# Altium PCB uz_per_voltage_card_breakout.PcbDoc
Units mm, origin at the board's own origin, x right, y up, seen from the top; angles counter-clockwise.
Board outline 80 x 118 mm, 2 copper layers (Top Layer, Bottom Layer); 33 components, 67 nets, 384 pads, 0 vias.
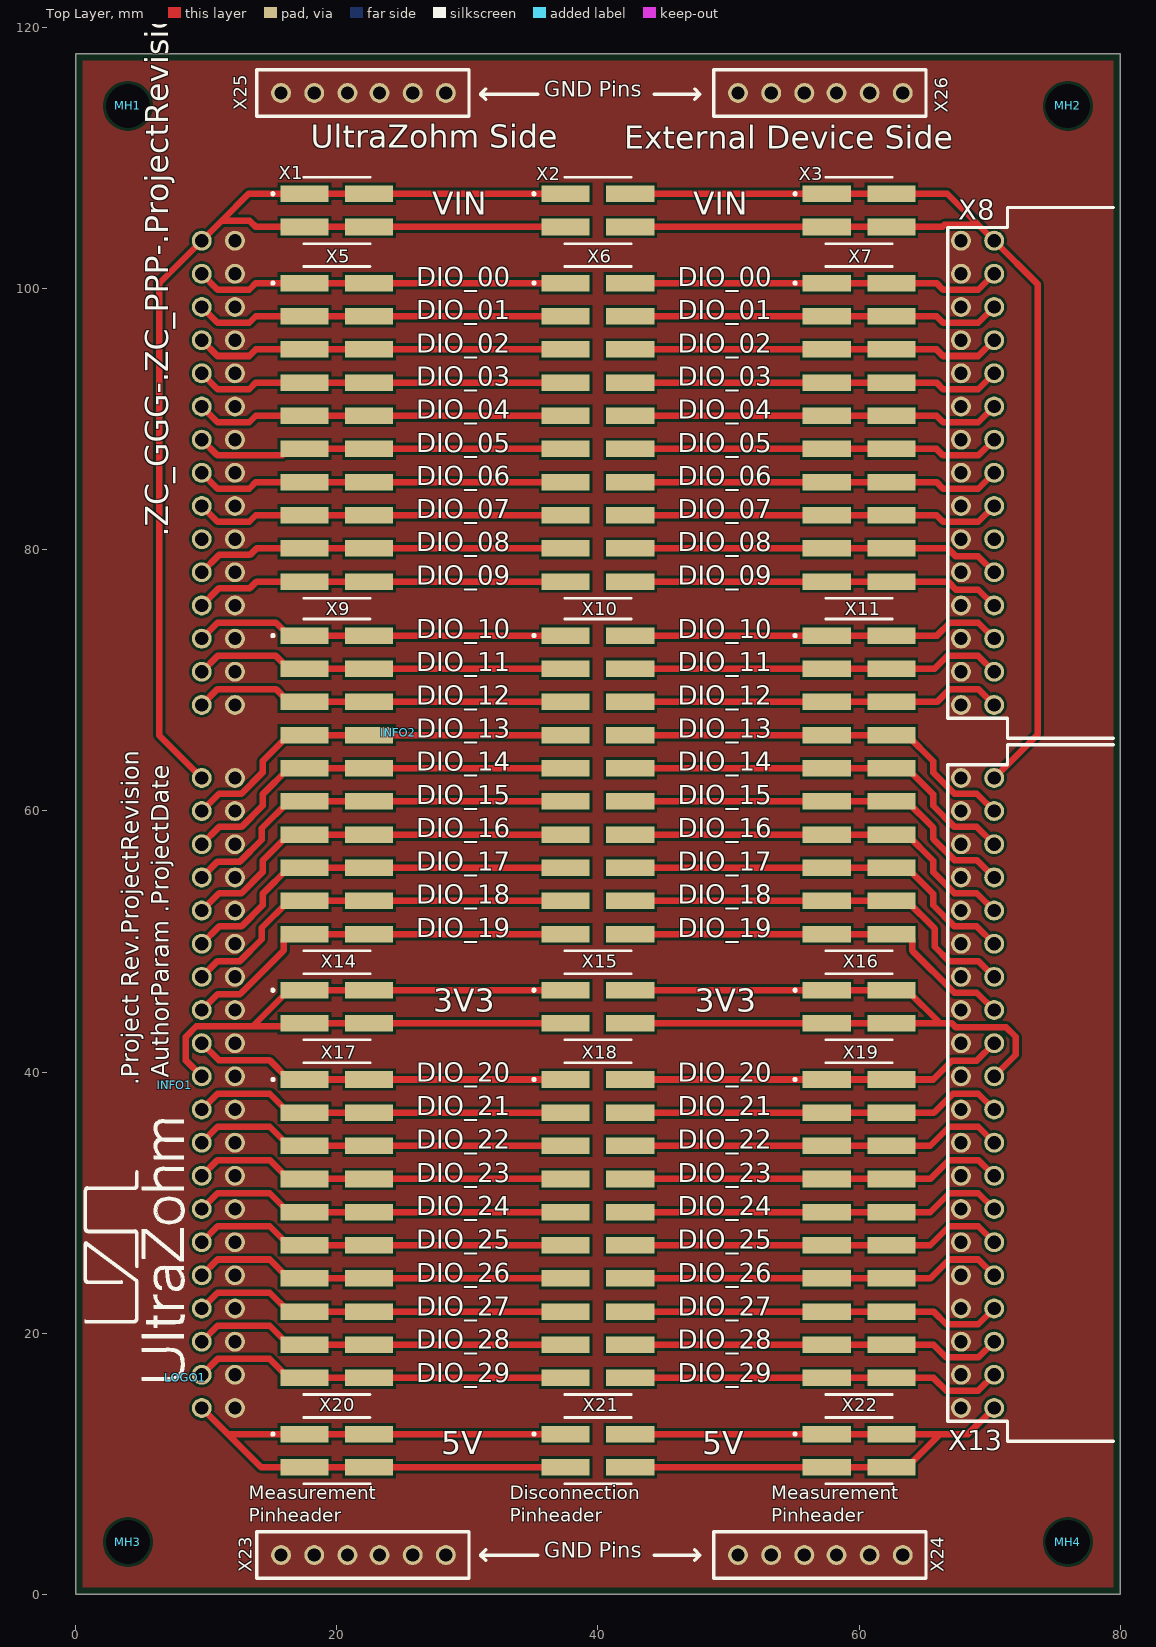
[diagram p0: Top Layer view]
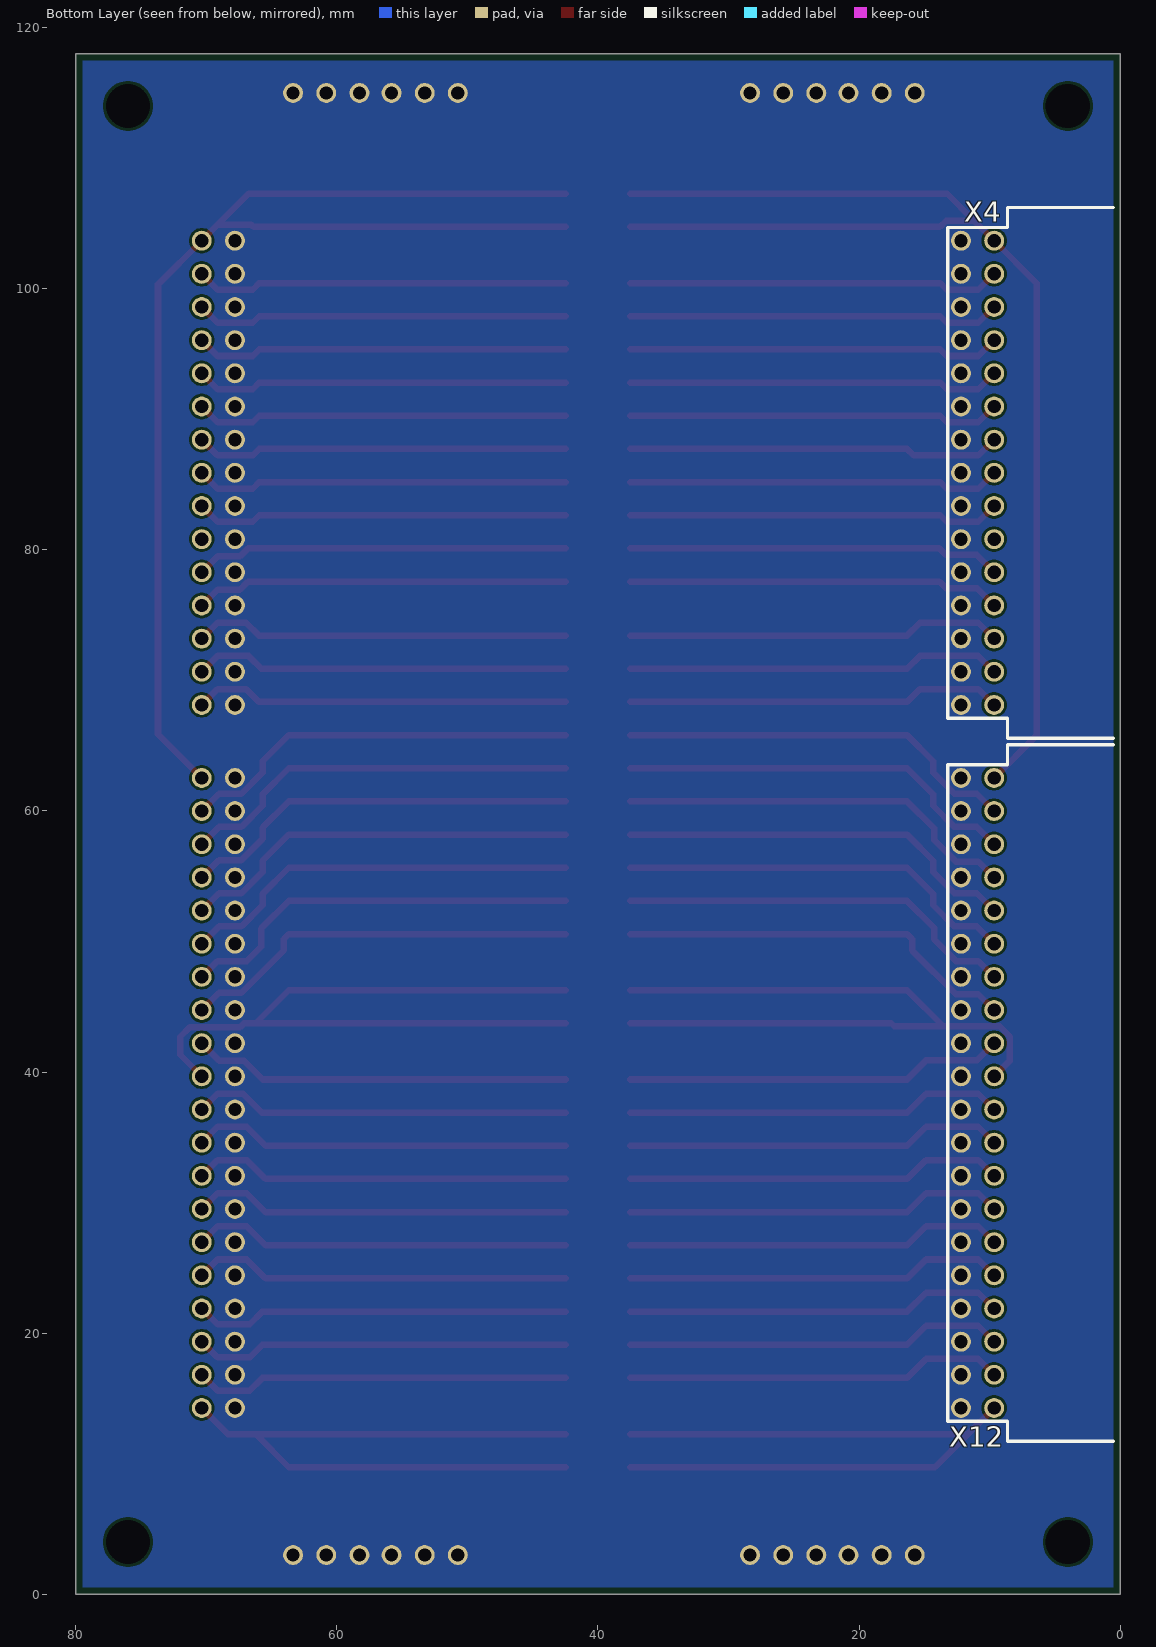
[diagram p1: Bottom Layer view, seen from below]
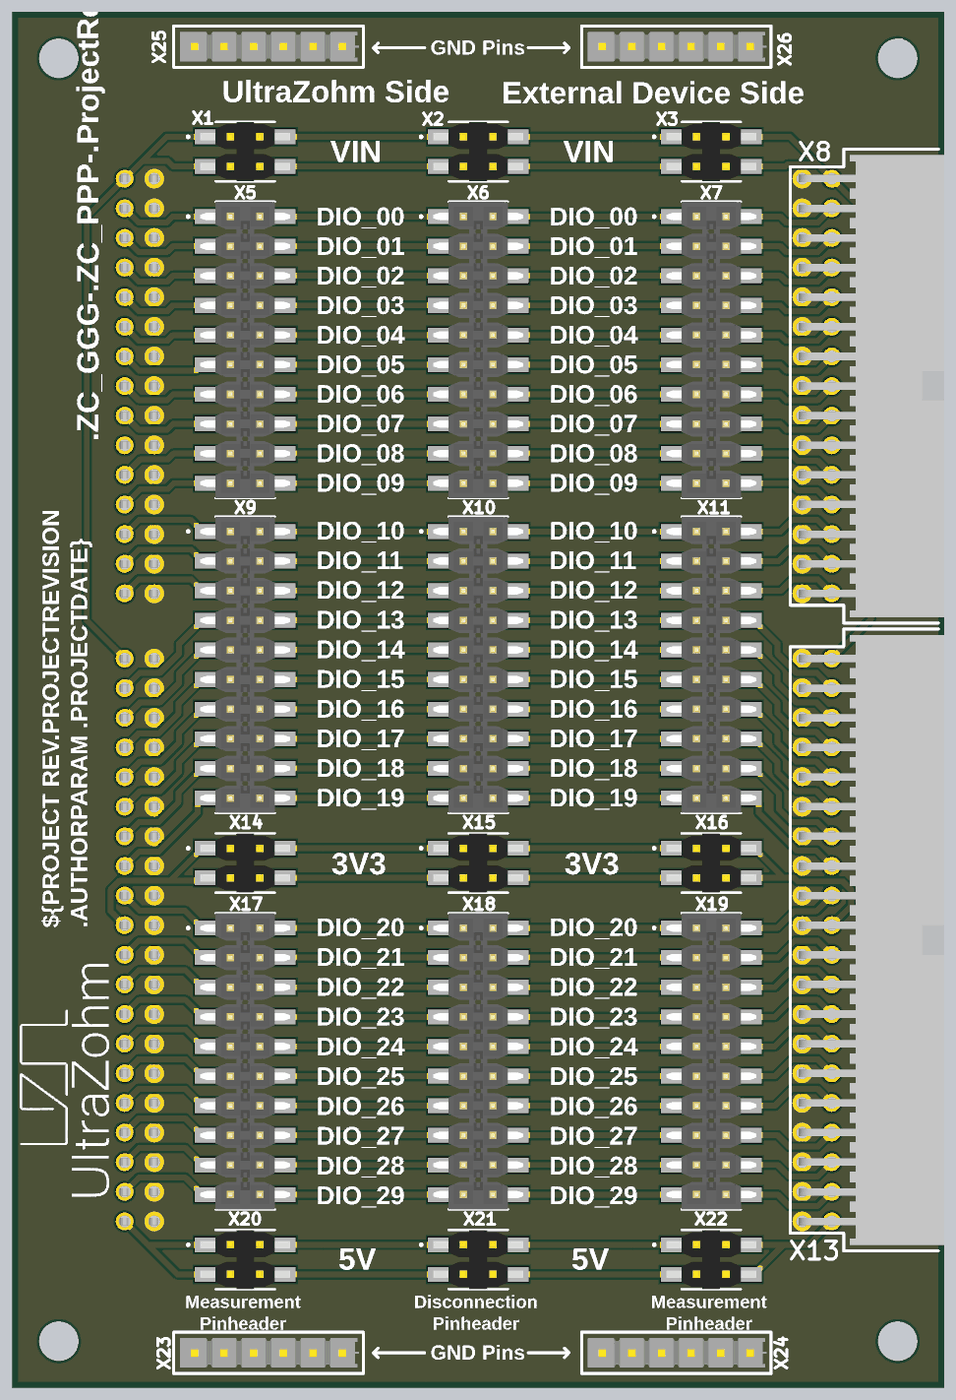
[diagram p2: 3D render of the assembled board from above, using the file's embedded part models]

## Layer stack, top to bottom
Top Solder: solder mask 0.0102, Solder Resist, Dk 3.5
Top Layer: signal copper 0.0356
Dielectric 1: dielectric 0.32, FR-4, Dk 4.8
Bottom Layer: signal copper 0.0356
Bottom Solder: solder mask 0.0102, Solder Resist, Dk 3.5

## Board outline
0,0 80,0 80,118 0,118

## Design rules (kind name [scope] priority, off if disabled: settings)
BoardOutlineClearance BoardOutlineClearance_TopOverlay [OnLayer('Top Overlay') or OnLayer('Bottom Overlay')] p1: gap=0 ignorepadtopadclearanceinfootprint=FALSE
BoardOutlineClearance [All] p2: gap=0.508 ignorepadtopadclearanceinfootprint=FALSE except(0: Arc-SplitContinuation Track-SplitContinuation SMDPad-SplitContinuation THPad-SplitContinuation Via-SplitContinuation Fill-SplitContinuation Poly-SplitContinuation Region-SplitContinuation Text-OutlineEdge Text-CavityEdge Text-CutoutEdge Text-SplitBarrior Text-SplitContinuation; 0.254: SMDPad-OutlineEdge SMDPad-CavityEdge SMDPad-CutoutEdge SMDPad-SplitBarrior)
Clearance [All] p1: gap=0.2 ignorepadtopadclearanceinfootprint=FALSE except(0: Arc-Text Track-Text SMDPad-Text THPad-Text Via-Text Fill-Text Poly-Text Region-Text Text-Text Text-Hole; 0.127: Arc-Arc Arc-Track Track-Track SMDPad-SMDPad; 0.5: THPad-THPad Via-Via)
ComponentClearance [All] p1: gap=0 collisioncheckmode=3 verticalgap=0 showdistances=FALSE
DiffPairsRouting [All] p1: maxlimit=0.127 minlimit=0.127 mostfreqgap=0.127 toplayer_minwidth=0.254 toplayer_maxwidth=0.254 toplayer_prefwidth=0.254 bottomlayer_minwidth=0.254 bottomlayer_maxwidth=0.254 bottomlayer_prefwidth=0.254 impedanceprofiledriven=TRUE maxuncoupledlength=12.7
HoleSize [All] p1: absolutevalues=TRUE maxlimit=6.3 minlimit=0.2 maxpercent=80.000 minpercent=20.000
MatchedLengths [All] p1: tolerance=0.254 checknetsindiffpair=TRUE checkdiffpairvsdiffpair=FALSE checkxsignals=FALSE checkothers=FALSE
MinimumSolderMaskSliver [All] p1: minsoldermaskwidth=0.089
PlaneConnect [All] p1: pad.planeconnectstyle=Relief pad.reliefexpansion=0.508 pad.reliefentries=4 pad.reliefconductorwidth=0.254 pad.reliefairgap=0.254 via.planeconnectstyle=Direct via.reliefexpansion=0.508 via.reliefentries=4 via.reliefconductorwidth=0.254 via.reliefairgap=0.254
PolygonConnect PolygonConnect_GND [InNet('GND')] p1 off: thpad.connectstyle=Relief thpad.reliefconductorwidth=0.254 thpad.reliefentries=4 thpad.polygonreliefangle="90 Angle" thpad.airgapwidth=0.254 smdpad.connectstyle=Relief smdpad.reliefconductorwidth=0.254 smdpad.reliefentries=4 smdpad.polygonreliefangle="90 Angle" smdpad.airgapwidth=0.254 via.connectstyle=Direct via.reliefconductorwidth=0.254 via.reliefentries=4 via.polygonreliefangle="90 Angle" via.airgapwidth=0.254
PolygonConnect [All] p2: connectstyle=Direct reliefconductorwidth=0.254 reliefentries=4 polygonreliefangle="90 Angle" airgapwidth=0.127
RoutingVias [All] p1: holewidth=0.3 width=0.6 viastyle="Through Hole" minholewidth=0.2 minwidth=0.4 maxholewidth=0.8 maxwidth=1.6
SilkToSilkClearance [All] p1: silktosilkclearance=0
SilkToSolderMaskClearance [IsPad] p1: minsilkscreentomaskgap=0 clearancetoexposedcopper=TRUE
SolderMaskExpansion [All] p1: expansion=0.102 istentingtop=FALSE
SupplyNets "Schematic Supply Nets_13" [InNet('3V3_EXT')] p1: voltage=0.000
SupplyNets "Schematic Supply Nets_12" [InNet('5V_UZ')] p2: voltage=0.000
SupplyNets "Schematic Supply Nets_11" [InNet('VIN_UZ')] p3: voltage=0.000
SupplyNets "Schematic Supply Nets_10" [InNet('3V3_UZ')] p4: voltage=0.000
SupplyNets "Schematic Supply Nets_9" [InNet('VIN_EXT')] p5: voltage=0.000
SupplyNets "Schematic Supply Nets_8" [InNet('5V_EXT')] p6: voltage=0.000
SupplyNets "Schematic Supply Nets_6" [InNet('GND')] p7: voltage=0.000
Width width_s75 [InNetClass('S75')] p1 off: maxlimit=0.1 minlimit=0.1 preferedwidth=0.1 minimp=50.000000 maximp=50.000000 favimp=50.000000
Width [All] p2: maxlimit=10 minlimit=0.127 preferedwidth=0.254 minimp=50.000000 maximp=50.000000 favimp=50.000000
23 further rules are at their usual default settings.

## Classes and differential pairs
component class TopSheet: INFO1 INFO2 LOGO1
component class Connectors: MH1 MH2 MH3 MH4 X1 X2 X3 X4 X5 X6 X7 X8 X9 X10 X11 X12 X13 X14 X15 X16 X17 X18 X19 X20 X21 X22 X23 X24 X25 X26

## Components (designator, comment, footprint, x,y, rotation, side; value= is the part's Value field where it differs from the comment)
INFO1 "Design Information" Design_info 7.6,39 r90 top
INFO2 "ZC Serialnumber" ZC-Serial 24.7,66 r90 top value=GGG-PPP-VVvv
LOGO1 "UZ Logo" UZ_Logo_tiny 8.4,16.6 r90 top
MH1 "Mounting Hole M3" MH_3.4 4,114 r90 top value="Mounting Hole"
MH2 "Mounting Hole M3" MH_3.4 76,114 r90 top value="Mounting Hole"
MH3 "Mounting Hole M3" MH_3.4 4,4 r90 top value="Mounting Hole"
MH4 "Mounting Hole M3" MH_3.4 76,4 r90 top value="Mounting Hole"
X1 "PH 0.1\" SMD 2x02" TSM-102-01-L-DV 20,106 r90 top
X2 "PH 0.1\" SMD 2x02" TSM-102-01-L-DV 40,106 r90 top
X3 "PH 0.1\" SMD 2x02" TSM-102-01-L-DV 60,106 r90 top
X4 "IPL1-115-01-L-D-RA-K" IPL1-115-01-XX-D-RA 0,85.9 r270 bottom locked
X5 "PH 0.1\" SMD 2x10" TSM-110-01-L-DV 20,89 r90 top
X6 "PH 0.1\" SMD 2x10" TSM-110-01-L-DV 40,89 r90 top
X7 "PH 0.1\" SMD 2x10" TSM-110-01-L-DV 60,89 r90 top
X8 "IPL1-115-01-L-D-RA-K" IPL1-115-01-XX-D-RA 80,85.9 r270 top locked
X9 "PH 0.1\" SMD 2x10" TSM-110-01-L-DV 20,62 r90 top
X10 "PH 0.1\" SMD 2x10" TSM-110-01-L-DV 40,62 r90 top
X11 "PH 0.1\" SMD 2x10" TSM-110-01-L-DV 60,62 r90 top
X12 "IPL1-120-01-L-D-RA-K" IPL1-120-01-XX-D-RA 0,38.4 r270 bottom locked
X13 "IPL1-120-01-L-D-RA-K" IPL1-120-01-XX-D-RA 80,38.4 r270 top locked
X14 "PH 0.1\" SMD 2x02" TSM-102-01-L-DV 20,45 r90 top
X15 "PH 0.1\" SMD 2x02" TSM-102-01-L-DV 40,45 r90 top
X16 "PH 0.1\" SMD 2x02" TSM-102-01-L-DV 60,45 r90 top
X17 "PH 0.1\" SMD 2x10" TSM-110-01-L-DV 20,28 r90 top
X18 "PH 0.1\" SMD 2x10" TSM-110-01-L-DV 40,28 r90 top
X19 "PH 0.1\" SMD 2x10" TSM-110-01-L-DV 60,28 r90 top
X20 "PH 0.1\" SMD 2x02" TSM-102-01-L-DV 20,11 r90 top
X21 "PH 0.1\" SMD 2x02" TSM-102-01-L-DV 40,11 r90 top
X22 "PH 0.1\" SMD 2x02" TSM-102-01-L-DV 60,11 r90 top
X23 "TSW-106-07-L-S" TSW-106-XX-XXX-S 22,3 r180 top
X24 "TSW-106-07-L-S" TSW-106-XX-XXX-S 57,3 r180 top
X25 "TSW-106-07-L-S" TSW-106-XX-XXX-S 22,115 r180 top
X26 "TSW-106-07-L-S" TSW-106-XX-XXX-S 57,115 r180 top

## Footprints (in the part's own frame and the unit in brackets; to place one, negate y for a bottom-side part, rotate by r counter-clockwise, add the part's x,y. Pads: shape width x height; smd on the part's side, far side on the other; paste and mask are expansions set on the pad)
Design_info [mm] "Design information about the PCB"
IPL1-115-01-XX-D-RA [mil]
  round 60 hole 40 mask+3: 1(-700,-380) 2(-600,-380) 3(-500,-380) 4(-400,-380) 5(-300,-380) 6(-200,-380) 7(-100,-380) 8(0,-380) 9(100,-380) 10(200,-380) 11(300,-380) 12(400,-380) 13(500,-380) 14(600,-380) 15(700,-380) 16(-700,-480) 17(-600,-480) 18(-500,-480) 19(-400,-480) 20(-300,-480) 21(-200,-480) 22(-100,-480) 23(0,-480) 24(100,-480) 25(200,-480) 26(300,-480) 27(400,-480) 28(500,-480) 29(600,-480) 30(700,-480)
  silkscreen extent -800,-520 800,-20, body extent -780,-493 780,0, height 315
IPL1-120-01-XX-D-RA [mil]
  round 60 hole 40 mask+3: 1(-950,-380) 2(-850,-380) 3(-750,-380) 4(-650,-380) 5(-550,-380) 6(-450,-380) 7(-350,-380) 8(-250,-380) 9(-150,-380) 10(-50,-380) 11(50,-380) 12(150,-380) 13(250,-380) 14(350,-380) 15(450,-380) 16(550,-380) 17(650,-380) 18(750,-380) 19(850,-380) 20(950,-380) 21(-950,-480) 22(-850,-480) 23(-750,-480) 24(-650,-480) 25(-550,-480) 26(-450,-480) 27(-350,-480) 28(-250,-480) 29(-150,-480) 30(-50,-480) 31(50,-480) 32(150,-480) 33(250,-480) 34(350,-480) 35(450,-480) 36(550,-480) 37(650,-480) 38(750,-480) 39(850,-480) 40(950,-480)
  silkscreen extent -1050,-520 1050,-20, body extent -1030,-493 1030,0, height 315
MH_3.4 [mm]
  round 3.1 hole 3.4 unplated: 1(0,0)
TSM-102-01-L-DV [mm]
  rect 1.27x3.68 smd: 01(1.27,2.475) 02(1.27,-2.475) 03(-1.27,2.475) 04(-1.27,-2.475)
  silkscreen extent -2.54,-2.54 2.54,5, body extent -2.54,-3.85 2.54,3.85, height 9.65
TSM-110-01-L-DV [mm]
  rect 1.27x3.68 smd: 01(11.43,2.475) 02(11.43,-2.475) 03(8.89,2.475) 04(8.89,-2.475) 05(6.35,2.475) 06(6.35,-2.475) 07(3.81,2.475) 08(3.81,-2.475) 09(1.27,2.475) 10(1.27,-2.475) 11(-1.27,2.475) 12(-1.27,-2.475) 13(-3.81,2.475) 14(-3.81,-2.475) 15(-6.35,2.475) 16(-6.35,-2.475) 17(-8.89,2.475) 18(-8.89,-2.475) 19(-11.43,2.475) 20(-11.43,-2.475)
  silkscreen extent -12.7,-2.54 12.7,5, body extent -12.7,-3.85 12.7,3.85, height 9.91
TSW-106-XX-XXX-S [mil]
  round 60 hole 40 mask+3: 1(-250,0) 2(-150,0) 3(-50,0) 4(46.85,0) 5(146.85,0) 6(246.85,0)
  silkscreen extent -320,-70 320,70, body extent -305,-50 300,50, height 330
UZ_Logo_tiny [mm] "logo width 2cm"
  silkscreen extent -0.2,0.06 19.75,7.74
ZC-Serial [mm] "Serialnumber"

## Part data
INFO1: library part Design_info
INFO2: library part ZC-Serial, Manufacturer=UltraZohm, Supplier Part Number 1=-, Component Type="ZC Serialnumber", ComponentLink1Description=https://docs.ultrazohm.com/, ComponentLink1URL=homepage, Created from=FRosner, Created On="15.04.2025 09:17:14", Last Updated="15.04.2025 09:17:14", Live Cycle Status=1, Manufacturer Part Number=ZC-Serial, PartID=58, Supplier 1=-, Type="Serial Number"
LOGO1: library part 1, "Official Project Logo of the UltraZohm", Manufacturer="PCB Manufacturer", Manufacturer Part Number="UltraZohm Logo", Component Type=Logo, ComponentLink1Description=Homepage, ComponentLink1URL=https://ultrazohm.com, Created from="T. Wendt", Created On="19.02.2021 16:55:56", Last Updated="02.03.2021 14:31:24", Live Cycle Status=1, PartID=1, Type="Standard (No BOM)"
MH1 MH2 MH3 MH4: library part "Mounting Hole", "Mounting Hole", Device Package=-, Component Type="Mounting Hole", ComponentLink1Description=Datasheet, Created from=MHlatky, Created On="26.01.2021 09:19:51", Last Updated="21.03.2022 23:05:12", Live Cycle Status=1, Manufacturer="Mounting Hole", Manufacturer Part Number="Mounting Hole M3", PartID=16, Stock number="not stored", Supplier 1="Mounting Hole", Supplier Part Number 1="Mounting Hole", Type="Mounting Hole"
X1 X2 X3 X14 X15 X16 X20 X21 X22: library part UZgen_Conn_PinHead_2x02_SMD_100mil_90deg, "0.1\" Double-row Pin Header, 90°-to-PCB SMD, 2x02 Pins, 250V, 3A", Device Package="SMD 0.1\" 2x02", Manufacturer=UZgen, Pin Current=3A, Pin Voltage=250V, Created from=UZgenTool, Created On="17.02.2025 17:01:00", Last Updated="18.02.2025 11:20:45", Manufacturer Part Number=UZgen_Conn_PinHead_2x02_SMD_100mil_90deg, Mounting Type=SMD, PartID=1, Pin Count=4, Pin Layout=2x02, Pin Orientation="90° (standing)", Pin Pitch="0.1\" x 0.1\""
X4 X8: "Terminal Assembly, Double Row, Right Angle, Thru-Hole, 2.54 mm x 2.54 mm Pitch, 30 Pins", Device Package=Connector, Manufacturer=SAMTEC, Component Type="Samtec Connector", ComponentLink1Description=Homepage, ComponentLink1URL=https://www.samtec.com/products/ipl1, Created from=TWendt, Created On="12.02.2021 15:31:18", Last Updated="15.02.2021 10:07:42", Live Cycle Status=1, Manufacturer Part Number=IPL1-115-01-L-D-RA-K, Number of Positions=30, Number of Rows=2, PartID=34, Stock number="not stored", Supplier 1=SAMTEC, Supplier Part Number 1=IPL1-115-01-L-D-RA-K, Type=Connector
X5 X6 X7 X9 X10 X11 X17 X18 X19: library part UZgen_Conn_PinHead_2x10_SMD_100mil_90deg, "0.1\" Double-row Pin Header, 90°-to-PCB SMD, 2x10 Pins, 250V, 3A", Device Package="SMD 0.1\" 2x10", Manufacturer=UZgen, Pin Current=3A, Pin Voltage=250V, Created from=UZgenTool, Created On="18.02.2025 11:27:30", Last Updated="18.02.2025 11:27:30", Manufacturer Part Number=UZgen_Conn_PinHead_2x10_SMD_100mil_90deg, Mounting Type=SMD, PartID=9, Pin Count=20, Pin Layout=2x10, Pin Orientation="90° (standing)", Pin Pitch="0.1\" x 0.1\""
X12 X13: "Terminal Assembly, Double Row, Right Angle, Thru-Hole, 2.54 mm x 2.54 mm Pitch, 40 Pins", Device Package=Connector, Manufacturer=SAMTEC, Component Type="Samtec Connector", ComponentLink1Description=Homepage, ComponentLink1URL=https://www.samtec.com/products/ipl1, Created from=TWendt, Created On="12.02.2021 15:26:11", Last Updated="15.02.2021 10:07:42", Live Cycle Status=1, Manufacturer Part Number=IPL1-120-01-L-D-RA-K, Mounting Type=THT, Number of Positions=40, Number of Rows=2, PartID=33, Stock number="not stored", Supplier 1=SAMTEC, Supplier Part Number 1=IPL1-120-01-L-D-RA-K, Type=Connector
X23 X24 X25 X26: "Classic PCB Header Strips, 0.100\" pitch", LCSC Part Number=C492405, Manufacturer=SAMTEC, MPN=TSW-106-07-F-S, Operating Temperature="-55 °C to +105 °C", ComponentLink1Description=Datasheet, ComponentLink1URL=https://suddendocs.samtec.com/catalog_english/tsw_th.pdf, Created=2020_12_15_AGeiger, Created from=AGeiger, Created On="26.06.2023 09:53:59", Last Updated="26.06.2023 09:53:59", Manufacturer Part Number=TSW-106-07-L-S, MF=SAMTEC, Mounting Type=SMD, PartID=22, Series=TSW, Supplier 1=LCSC, Supplier Part Number 1=C492405

## Nets (pads, with @x,y where several pads share a name; then routed paths per layer and width w, separated by ;. In a path a pad name is that pad's centre, name@x,y a point inside that pad or via, vN(x,y) a via of type N, cw(c..) or ccw(c..) an arc to the next point about the centre after c; other vN are vias at no path point)
3V3_EXT: X13.10 X15.02 X15.04 X16.01 X16.02 X16.03 X16.04 | length 58.5
  Top Layer w0.5: X15.04 X16.03 X16.04 66.22,43.73 ; X15.02 X16.01 X16.02 63.68,46.27 66.22,43.73 ; X13.10 72,41.322 72,42.7 71.278,43.422 67.422,43.422 67.114,43.73 66.22,43.73
3V3_UZ: X12.10 X14.01 X14.02 X14.03 X14.04 X15.01 X15.03 | length 58.2
  Top Layer w0.5: X12.10 8.44,40.882 8.44,42.712 9.228,43.5 13.55,43.5 ; X15.03 X14.04 X14.03 17.295,43.5 13.55,43.5 ; X15.01 X14.02 X14.01 16.32,46.27 13.55,43.5
5V_EXT: X13.20 X21.02 X21.04 X22.01 X22.02 X22.03 X22.04 | length 53.5
  Top Layer w0.5: X21.04 X22.03 X22.04 63.68,9.73 66.22,12.27 ; X21.02 X22.01 X22.02 66.22,12.27 ; X13.20 68.348,12.27 66.22,12.27
5V_UZ: X12.20 X20.01 X20.02 X20.03 X20.04 X21.01 X21.03 | length 55.6
  Top Layer w0.5: X12.20 11.652,12.27 ; X21.03 27.84,9.73 X20.04 X20.03 14.192,9.73 11.652,12.27 ; X21.01 25.3,12.27 X20.02 X20.01 11.652,12.27
DIO_00_EXT: X6.02 X7.01 X7.02 X8.2 | length 28.6
  Top Layer w0.5: X6.02 X7.01 X7.02 65.937,100.43 66.439,99.928 69.136,99.928 X8.2
DIO_00_UZ: X4.2 X5.01 X5.02 X6.01 | length 28.6
  Top Layer w0.5: X4.2 10.864,99.928 13.287,99.928 13.789,100.43 X5.01 X5.02 X6.01
DIO_01_EXT: X6.04 X7.03 X7.04 X8.3 | length 28.6
  Top Layer w0.5: X6.04 X7.03 X7.04 65.937,97.89 66.439,97.388 69.136,97.388 X8.3
DIO_01_UZ: X4.3 X5.03 X5.04 X6.03 | length 28.6
  Top Layer w0.5: X4.3 10.864,97.388 13.287,97.388 13.789,97.89 X5.03 X5.04 X6.03
DIO_02_EXT: X6.06 X7.05 X7.06 X8.4 | length 28.6
  Top Layer w0.5: X6.06 X7.05 X7.06 65.937,95.35 66.439,94.848 69.136,94.848 X8.4
DIO_02_UZ: X4.4 X5.05 X5.06 X6.05 | length 28.6
  Top Layer w0.5: X4.4 10.864,94.848 13.287,94.848 13.789,95.35 X5.05 X5.06 X6.05
DIO_03_EXT: X6.08 X7.07 X7.08 X8.5 | length 28.6
  Top Layer w0.5: X6.08 X7.07 X7.08 65.937,92.81 66.439,92.308 69.136,92.308 X8.5
DIO_03_UZ: X4.5 X5.07 X5.08 X6.07 | length 28.6
  Top Layer w0.5: X4.5 10.864,92.308 13.287,92.308 13.789,92.81 X5.07 X5.08 X6.07
DIO_04_EXT: X6.10 X7.09 X7.10 X8.6 | length 28.6
  Top Layer w0.5: X6.10 X7.09 X7.10 65.937,90.27 66.439,89.768 69.136,89.768 X8.6
DIO_04_UZ: X4.6 X5.09 X5.10 X6.09 | length 28.6
  Top Layer w0.5: X4.6 10.864,89.768 13.287,89.768 13.789,90.27 X5.09 X5.10 X6.09
DIO_05_EXT: X6.12 X7.11 X7.12 X8.7 | length 28.6
  Top Layer w0.5: X6.12 X7.11 X7.12 65.937,87.73 66.439,87.228 69.136,87.228 X8.7
DIO_05_UZ: X4.7 X5.11 X5.12 X6.11 | length 28.6
  Top Layer w0.5: X4.7 10.864,87.228 15.818,87.228 16.32,87.73 X5.11 X5.12 X6.11
DIO_06_EXT: X6.14 X7.13 X7.14 X8.8 | length 28.6
  Top Layer w0.5: X6.14 X7.13 X7.14 65.937,85.19 66.439,84.688 69.136,84.688 X8.8
DIO_06_UZ: X4.8 X5.13 X5.14 X6.13 | length 28.6
  Top Layer w0.5: X4.8 10.864,84.688 13.287,84.688 13.789,85.19 X5.13 X5.14 X6.13
DIO_07_EXT: X6.16 X7.15 X7.16 X8.9 | length 28.6
  Top Layer w0.5: X6.16 X7.15 X7.16 65.937,82.65 66.439,82.148 69.136,82.148 X8.9
DIO_07_UZ: X4.9 X5.15 X5.16 X6.15 | length 28.6
  Top Layer w0.5: X4.9 10.864,82.148 13.287,82.148 13.789,82.65 X5.15 X5.16 X6.15
DIO_08_EXT: X6.18 X7.17 X7.18 X8.11 | length 28.6
  Top Layer w0.5: X6.18 X7.17 X7.18 66.804,80.11 67.422,79.492 69.136,79.492 X8.11
DIO_08_UZ: X4.11 X5.17 X5.18 X6.17 | length 28.6
  Top Layer w0.5: X4.11 10.98,79.608 13.345,79.608 13.847,80.11 X5.17 X5.18 X6.17
DIO_09_EXT: X6.20 X7.19 X7.20 X8.12 | length 28.6
  Top Layer w0.5: X6.20 X7.19 X7.20 66.804,77.57 67.422,76.952 69.136,76.952 X8.12
DIO_09_UZ: X4.12 X5.19 X5.20 X6.19 | length 28.6
  Top Layer w0.5: X4.12 10.98,77.068 13.345,77.068 13.847,77.57 X5.19 X5.20 X6.19
DIO_10_EXT: X8.13 X10.02 X11.01 X11.02 | length 28.8
  Top Layer w0.5: X10.02 X11.01 X11.02 65.971,73.43 66.953,74.412 69.136,74.412 X8.13
DIO_10_UZ: X4.13 X9.01 X9.02 X10.01 | length 28.8
  Top Layer w0.5: X4.13 10.864,74.412 15.338,74.412 16.32,73.43 X9.01 X9.02 X10.01
DIO_11_EXT: X8.14 X10.04 X11.03 X11.04 | length 28.8
  Top Layer w0.5: X10.04 X11.03 X11.04 65.778,70.89 66.76,71.872 69.136,71.872 X8.14
DIO_11_UZ: X4.14 X9.03 X9.04 X10.03 | length 28.8
  Top Layer w0.5: X4.14 10.864,71.872 15.338,71.872 16.32,70.89 X9.03 X9.04 X10.03
DIO_12_EXT: X8.15 X10.06 X11.05 X11.06 | length 28.8
  Top Layer w0.5: X10.06 X11.05 X11.06 65.971,68.35 66.953,69.332 69.136,69.332 X8.15
DIO_12_UZ: X4.15 X9.05 X9.06 X10.05 | length 28.8
  Top Layer w0.5: X4.15 10.864,69.332 15.338,69.332 16.32,68.35 X9.05 X9.06 X10.05
DIO_13_EXT: X10.08 X11.07 X11.08 X13.2 | length 30.8
  Top Layer w0.5: X10.08 X11.07 X11.08 63.68,65.81 65.685,63.805 65.685,62.938 67.306,61.318 69.02,61.318 X13.2
DIO_13_UZ: X9.07 X9.08 X10.07 X12.2 | length 30.8
  Top Layer w0.5: X12.2 10.98,61.318 12.694,61.318 14.315,62.938 14.315,63.805 16.32,65.81 X9.07 X9.08 X10.07
DIO_14_EXT: X10.10 X11.09 X11.10 X13.3 | length 30.8
  Top Layer w0.5: X10.10 X11.09 X11.10 63.68,63.27 65.685,61.265 65.685,60.398 67.306,58.778 69.02,58.778 X13.3
DIO_14_UZ: X9.09 X9.10 X10.09 X12.3 | length 30.8
  Top Layer w0.5: X12.3 10.98,58.778 12.694,58.778 14.315,60.398 14.315,61.265 16.32,63.27 X9.09 X9.10 X10.09
DIO_15_EXT: X10.12 X11.11 X11.12 X13.4 | length 30.8
  Top Layer w0.5: X10.12 X11.11 X11.12 63.68,60.73 65.685,58.725 65.685,57.858 67.306,56.238 69.02,56.238 X13.4
DIO_15_UZ: X9.11 X9.12 X10.11 X12.4 | length 30.8
  Top Layer w0.5: X12.4 10.864,56.122 12.578,56.122 14.257,57.8 14.257,58.667 16.32,60.73 X9.11 X9.12 X10.11
DIO_16_EXT: X10.14 X11.13 X11.14 X13.5 | length 30.8
  Top Layer w0.5: X10.14 X11.13 X11.14 63.68,58.19 65.685,56.185 65.685,55.318 67.306,53.698 69.02,53.698 X13.5
DIO_16_UZ: X9.13 X9.14 X10.13 X12.5 | length 30.8
  Top Layer w0.5: X12.5 10.98,53.698 12.694,53.698 14.315,55.318 14.315,56.185 16.32,58.19 X9.13 X9.14 X10.13
DIO_17_EXT: X10.16 X11.15 X11.16 X13.6 | length 30.8
  Top Layer w0.5: X10.16 X11.15 X11.16 63.68,55.65 65.685,53.645 65.685,52.778 67.306,51.158 69.02,51.158 X13.6
DIO_17_UZ: X9.15 X9.16 X10.15 X12.6 | length 30.8
  Top Layer w0.5: X12.6 10.98,51.158 12.694,51.158 14.315,52.778 14.315,53.645 16.32,55.65 X9.15 X9.16 X10.15
DIO_18_EXT: X10.18 X11.17 X11.18 X13.7 | length 31.1
  Top Layer w0.5: X10.18 X11.17 X11.18 63.68,53.11 65.8,50.99 65.8,49.6 66.898,48.502 69.136,48.502 X13.7
DIO_18_UZ: X9.17 X9.18 X10.17 X12.7 | length 30.8
  Top Layer w0.5: X12.7 10.864,48.502 12.578,48.502 14.257,50.18 14.257,51.047 16.32,53.11 X9.17 X9.18 X10.17
DIO_19_EXT: X10.20 X11.19 X11.20 X13.8 | length 30.8
  Top Layer w0.5: X10.20 X11.19 X11.20 63.68,50.57 64.065,50.185 64.065,49.319 67.306,46.078 69.02,46.078 X13.8
DIO_19_UZ: X9.19 X9.20 X10.19 X12.8 | length 30.8
  Top Layer w0.5: X12.8 10.864,45.962 12.578,45.962 15.935,49.319 15.935,50.185 16.32,50.57 X9.19 X9.20 X10.19
DIO_20_EXT: X13.9 X18.02 X19.01 X19.02 | length 29
  Top Layer w0.5: X18.02 X19.01 X19.02 65.678,39.43 67.13,40.882 69.02,40.882 X13.9
DIO_20_UZ: X12.9 X17.01 X17.02 X18.01 | length 29
  Top Layer w0.5: X12.9 10.947,40.915 14.835,40.915 16.32,39.43 X17.01 X17.02 X18.01
DIO_21_EXT: X13.11 X18.04 X19.03 X19.04 | length 29
  Top Layer w0.5: X18.04 X19.03 X19.04 65.736,36.89 67.188,38.342 69.136,38.342 X13.11
DIO_21_UZ: X12.11 X17.03 X17.04 X18.03 | length 29
  Top Layer w0.5: X12.11 10.864,38.342 14.868,38.342 16.32,36.89 X17.03 X17.04 X18.03
DIO_22_EXT: X13.12 X18.06 X19.05 X19.06 | length 29
  Top Layer w0.5: X18.06 X19.05 X19.06 65.462,34.35 66.914,35.802 69.136,35.802 X13.12
DIO_22_UZ: X12.12 X17.05 X17.06 X18.05 | length 29
  Top Layer w0.5: X12.12 10.864,35.802 14.868,35.802 16.32,34.35 X17.05 X17.06 X18.05
DIO_23_EXT: X13.13 X18.08 X19.07 X19.08 | length 29
  Top Layer w0.5: X18.08 X19.07 X19.08 65.462,31.81 66.914,33.262 69.136,33.262 X13.13
DIO_23_UZ: X12.13 X17.07 X17.08 X18.07 | length 29
  Top Layer w0.5: X12.13 10.864,33.262 14.868,33.262 16.32,31.81 X17.07 X17.08 X18.07
DIO_24_EXT: X13.14 X18.10 X19.09 X19.10 | length 29
  Top Layer w0.5: X18.10 X19.09 X19.10 65.462,29.27 66.914,30.722 69.136,30.722 X13.14
DIO_24_UZ: X12.14 X17.09 X17.10 X18.09 | length 29
  Top Layer w0.5: X12.14 10.864,30.722 14.868,30.722 16.32,29.27 X17.09 X17.10 X18.09
DIO_25_EXT: X13.15 X18.12 X19.11 X19.12 | length 29
  Top Layer w0.5: X18.12 X19.11 X19.12 65.462,26.73 66.914,28.182 69.136,28.182 X13.15
DIO_25_UZ: X12.15 X17.11 X17.12 X18.11 | length 29
  Top Layer w0.5: X12.15 10.864,28.182 14.868,28.182 16.32,26.73 X17.11 X17.12 X18.11
DIO_26_EXT: X13.16 X18.14 X19.13 X19.14 | length 29
  Top Layer w0.5: X18.14 X19.13 X19.14 65.462,24.19 66.914,25.642 69.136,25.642 X13.16
DIO_26_UZ: X12.16 X17.13 X17.14 X18.13 | length 29
  Top Layer w0.5: X12.16 10.864,25.642 14.868,25.642 16.32,24.19 X17.13 X17.14 X18.13
DIO_27_EXT: X13.17 X18.16 X19.15 X19.16 | length 28.8
  Top Layer w0.5: X18.16 X19.15 X19.16 65.702,21.65 66.674,20.678 69.136,20.678 X13.17
DIO_27_UZ: X12.17 X17.15 X17.16 X18.15 | length 29
  Top Layer w0.5: X12.17 10.864,23.102 14.868,23.102 16.32,21.65 X17.15 X17.16 X18.15
DIO_28_EXT: X13.18 X18.18 X19.17 X19.18 | length 28.8
  Top Layer w0.5: X18.18 X19.17 X19.18 65.702,19.11 66.674,18.138 69.136,18.138 X13.18
DIO_28_UZ: X12.18 X17.17 X17.18 X18.17 | length 29
  Top Layer w0.5: X12.18 10.864,20.562 14.868,20.562 16.32,19.11 X17.17 X17.18 X18.17
DIO_29_EXT: X13.19 X18.20 X19.19 X19.20 | length 28.8
  Top Layer w0.5: X18.20 X19.19 X19.20 65.702,16.57 66.674,15.598 69.136,15.598 X13.19
DIO_29_UZ: X12.19 X17.19 X17.20 X18.19 | length 29
  Top Layer w0.5: X12.19 10.864,18.022 14.868,18.022 16.32,16.57 X17.19 X17.20 X18.19
GND: X4.16 X4.17 X4.18 X4.19 X4.20 X4.21 X4.22 X4.23 X4.24 X4.25 X4.26 X4.27 X4.28 X4.29 X4.30 X8.16 X8.17 X8.18 X8.19 X8.20 X8.21 X8.22 X8.23 X8.24 X8.25 X8.26 X8.27 X8.28 X8.29 X8.30 X12.21 X12.22 X12.23 X12.24 X12.25 X12.26 X12.27 X12.28 X12.29 X12.30 X12.31 X12.32 X12.33 X12.34 X12.35 X12.36 X12.37 X12.38 X12.39 X12.40 X13.21 X13.22 X13.23 X13.24 X13.25 X13.26 X13.27 X13.28 X13.29 X13.30 X13.31 X13.32 X13.33 X13.34 X13.35 X13.36 X13.37 X13.38 X13.39 X13.40 X23.1 X23.2 X23.3 X23.4 X23.5 X23.6 X24.1 X24.2 X24.3 X24.4 X24.5 X24.6 X25.1 X25.2 X25.3 X25.4 X25.5 X25.6 X26.1 X26.2 X26.3 X26.4 X26.5 X26.6
VIN_EXT: X2.02 X2.04 X3.01 X3.02 X3.03 X3.04 X8.1 X13.1 | length 100
  Top Layer w0.5: X2.04 X3.03 X3.04 66.381,104.73 66.543,104.892 69.136,104.892 ; X2.02 X3.01 X3.02 66.758,107.27 69.136,104.892 ; X13.1 73.7,65.882 73.7,100.328 X8.1 69.136,104.892
VIN_UZ: X1.01 X1.02 X1.03 X1.04 X2.01 X2.03 X4.1 X12.1 | length 99.7
  Top Layer w0.5: X12.1 6.4,65.782 6.4,100.428 X4.1 11.186,105.214 ; X2.03 X1.04 X1.03 13.802,104.73 13.319,105.214 11.186,105.214 ; X2.01 X1.02 X1.01 13.242,107.27 11.186,105.214
pads on no net: MH1.1 MH2.1 MH3.1 MH4.1 X4.10 X8.10

## Polygon pours and split planes (outlines as drawn)
GND on Bottom Layer "GND_Plane_L02" (solid, remove dead copper, pour order 0): 0,0 80,0 80,118 0,118
GND on Top Layer "GND_Plane_L01" (solid, remove dead copper, pour order 1): 0,0 80,0 80,118 0,118

## Silkscreen, mask and mechanical layers (free items; w line width, h text height)
Top Overlay:
  lines w0.254: 31.4,2.6 31,3 ; 31.4,3.4 31,3 ; 31.4,114.5 31,114.9 ; 31.4,115.3 31,114.9 ; 35.4,3 31,3 ; 35.4,114.9 31,114.9 ; 44.3,3 47.8,3 ; 44.3,114.9 47.8,114.9 ; 47.4,2.6 47.8,3 ; 47.4,3.4 47.8,3 ; 47.4,114.5 47.8,114.9 ; 47.4,115.3 47.8,114.9 ; 31,3 31,3 ; 31,114.9 31,114.9 ; 47.8,3 47.8,3 ; 47.8,114.9 47.8,114.9
  text "GND Pins" at 35.9,114.324 h2
  text "UltraZohm Side" at 18,110.236 h3
  text "External Device Side" at 42,110.136 h3
  text "VIN" at 27.3,105.1 h3
  text "VIN" at 47.3,105.1 h3
  text "DIO_00" at 26.1,99.685 h2.5
  text "DIO_00" at 46.1,99.685 h2.5
  text "DIO_01" at 26.1,97.148 h2.5
  text "DIO_01" at 46.1,97.148 h2.5
  text "DIO_02" at 26.1,94.61 h2.5
  text "DIO_02" at 46.1,94.61 h2.5
  text "DIO_03" at 26.1,92.072 h2.5
  text "DIO_03" at 46.1,92.072 h2.5
  text "DIO_04" at 26.1,89.534 h2.5
  text "DIO_04" at 46.1,89.534 h2.5
  text "DIO_05" at 26.1,86.996 h2.5
  text "DIO_05" at 46.1,86.996 h2.5
  text "DIO_06" at 26.1,84.458 h2.5
  text "DIO_06" at 46.1,84.458 h2.5
  text "DIO_07" at 26.1,81.92 h2.5
  text "DIO_07" at 46.1,81.92 h2.5
  text "DIO_08" at 26.1,79.382 h2.5
  text "DIO_08" at 46.1,79.382 h2.5
  text "DIO_09" at 26.1,76.844 h2.5
  text "DIO_09" at 46.1,76.844 h2.5
  text "DIO_10" at 26.1,72.742 h2.5
  text "DIO_10" at 46.1,72.742 h2.5
  text "DIO_11" at 26.1,70.198 h2.5
  text "DIO_11" at 46.1,70.198 h2.5
  text "DIO_12" at 26.1,67.653 h2.5
  text "DIO_12" at 46.1,67.653 h2.5
  text "DIO_13" at 26.1,65.109 h2.5
  text "DIO_13" at 46.1,65.109 h2.5
  text "DIO_14" at 26.1,62.564 h2.5
  text "DIO_14" at 46.1,62.564 h2.5
  text "DIO_15" at 26.1,60.02 h2.5
  text "DIO_15" at 46.1,60.02 h2.5
  text "DIO_16" at 26.1,57.475 h2.5
  text "DIO_16" at 46.1,57.475 h2.5
  text "DIO_17" at 26.1,54.931 h2.5
  text "DIO_17" at 46.1,54.931 h2.5
  text "DIO_18" at 26.1,52.386 h2.5
  text "DIO_18" at 46.1,52.386 h2.5
  text "DIO_19" at 26.1,49.842 h2.5
  text "DIO_19" at 46.1,49.842 h2.5
  text "3V3" at 27.4,44.036 h3
  text "3V3" at 47.4,44.036 h3
  text "DIO_20" at 26.1,38.742 h2.5
  text "DIO_20" at 46.1,38.742 h2.5
  text "DIO_21" at 26.1,36.186 h2.5
  text "DIO_21" at 46.1,36.186 h2.5
  text "DIO_22" at 26.1,33.631 h2.5
  text "DIO_22" at 46.1,33.631 h2.5
  text "DIO_23" at 26.1,31.075 h2.5
  text "DIO_23" at 46.1,31.075 h2.5
  text "DIO_24" at 26.1,28.52 h2.5
  text "DIO_24" at 46.1,28.52 h2.5
  text "DIO_25" at 26.1,25.964 h2.5
  text "DIO_25" at 46.1,25.964 h2.5
  text "DIO_26" at 26.1,23.409 h2.5
  text "DIO_26" at 46.1,23.409 h2.5
  text "DIO_27" at 26.1,20.853 h2.5
  text "DIO_27" at 46.1,20.853 h2.5
  text "DIO_28" at 26.1,18.298 h2.5
  text "DIO_28" at 46.1,18.298 h2.5
  text "DIO_29" at 26.1,15.742 h2.5
  text "DIO_29" at 46.1,15.742 h2.5
  text "5V" at 28,10.136 h3
  text "5V" at 48,10.136 h3
  text "Measurement / Pinheader" at 13.255,5.2 h1.75
  text "Disconnection / Pinheader" at 33.255,5.2 h1.75
  text "Measurement / Pinheader" at 53.255,5.2 h1.75
  text "GND Pins" at 35.9,2.424 h2
Mechanical 1:
  the board outline again, w0.2